# EAGLE board h_bridge_v1 (EAGLE 5.00)
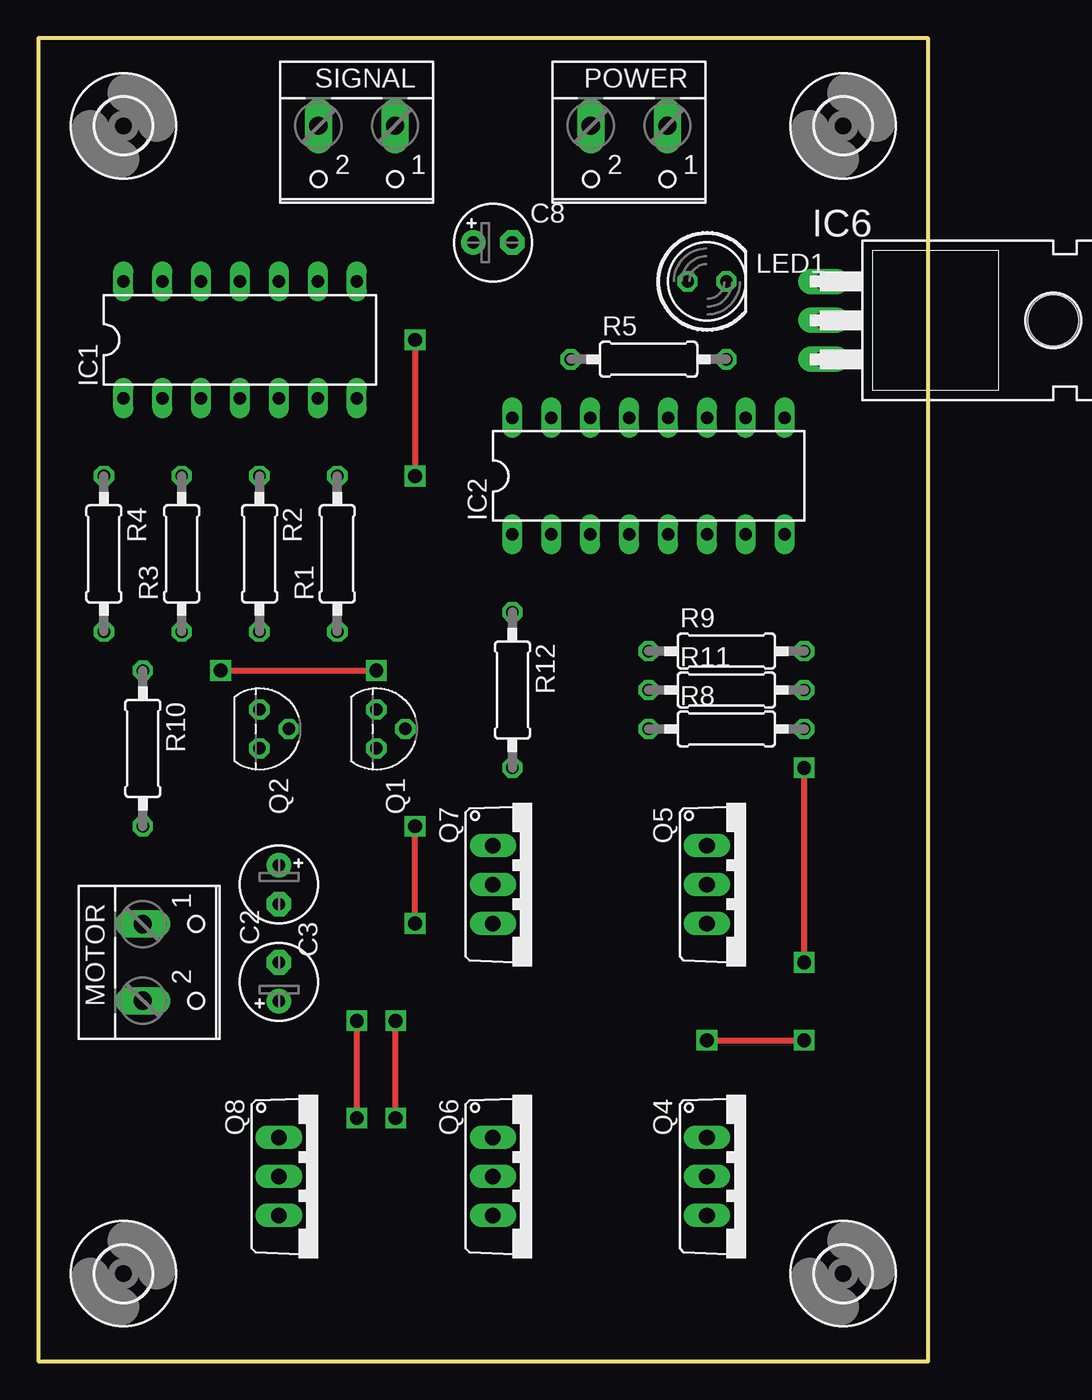
[diagram p0: board, top side]
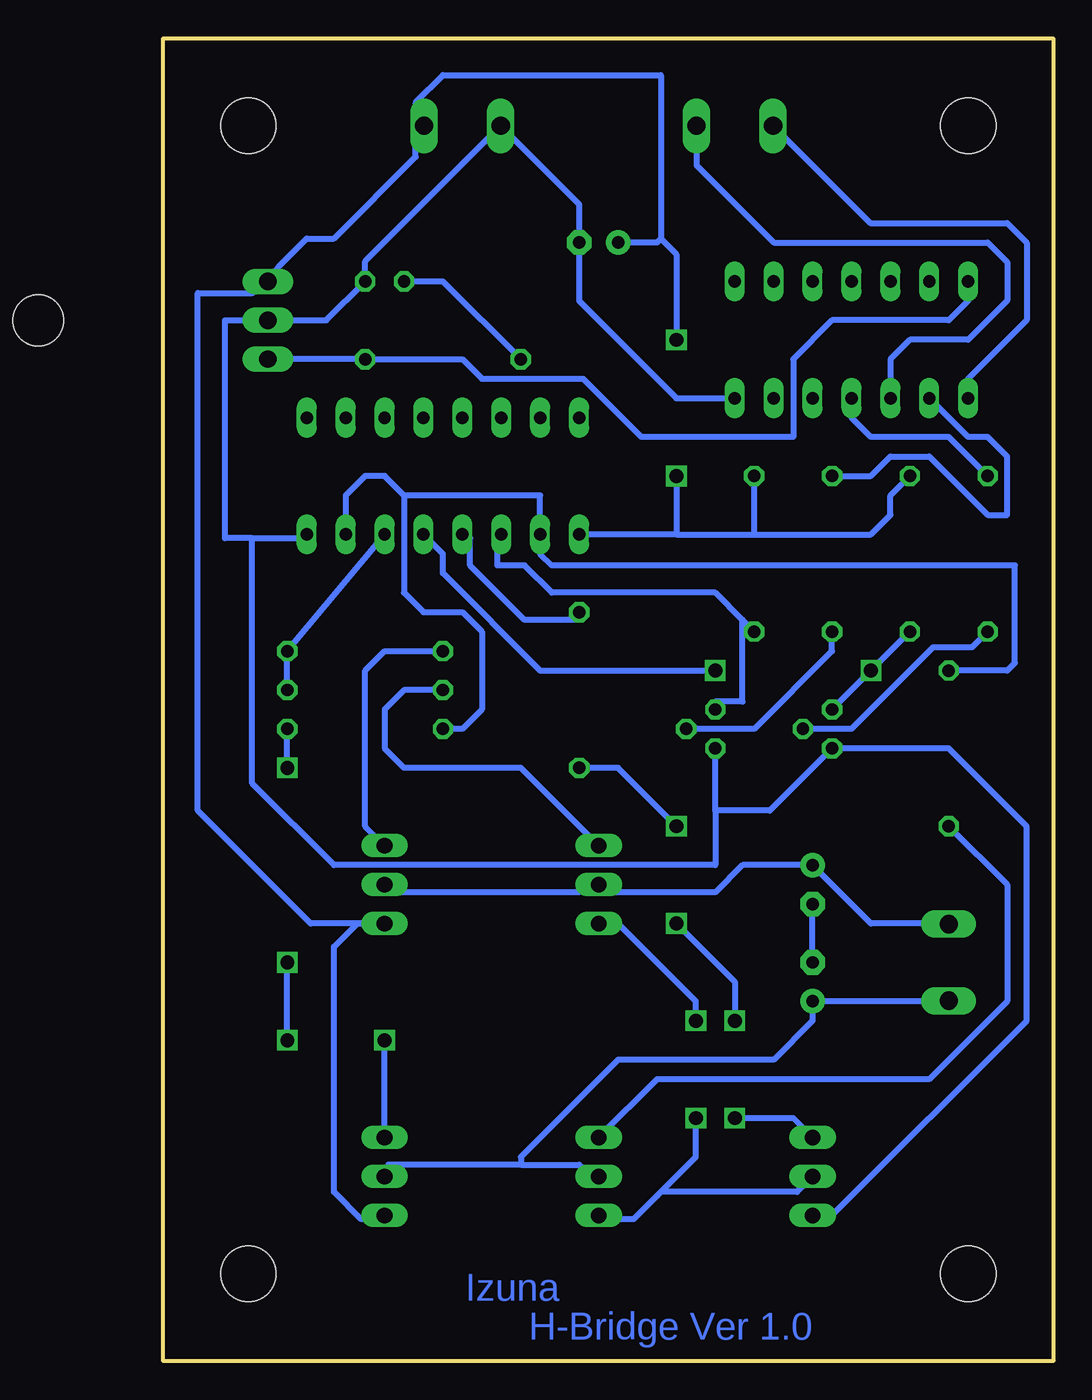
[diagram p1: board, bottom side, seen from below]

Size 58.09 x 86.35 mm. Coordinates in mm from the lower left corner, seen from the top.
Outline: 0,0 58.09,0 58.09,86.35 0,86.35 0,0
Copper layers (1*16): Top 0.035mm / dielectric 1.5mm / Bottom 0.035mm
Design rules "default": minimum track width 10mil, minimum drill 24mil, track to track 8mil, track to pad 8mil, pad to pad 8mil, via to via 8mil, smd to smd 8mil, copper to edge 40mil, drill to drill 8mil, minimum pad ring 10mil, minimum via ring 8mil, stop-mask expansion 4mil, vias tented up to drill 0mil, thermal gap 10mil

## Footprints (pad centres in the part's own frame; a part is rotated, then mirrored left to right if it is on the bottom)
E2,5-5 = drill 0.813 pad 1.6 round: + -1.27,0 | drill 0.813 pad 1.6 octagon: - 1.27,0
DIL14 = drill 0.813 long: 1 -7.62,-3.81; 2 -5.08,-3.81; 3 -2.54,-3.81; 4 0,-3.81; 5 2.54,-3.81; 6 5.08,-3.81; 7 7.62,-3.81; 8 7.62,3.81; 9 5.08,3.81; 10 2.54,3.81; 11 0,3.81; 12 -2.54,3.81; 13 -5.08,3.81; 14 -7.62,3.81
DIL16 = drill 0.813 long: 1 -8.89,-3.81; 2 -6.35,-3.81; 3 -3.81,-3.81; 4 -1.27,-3.81; 5 1.27,-3.81; 6 3.81,-3.81; 7 6.35,-3.81; 8 8.89,-3.81; 9 8.89,3.81; 10 6.35,3.81; 11 3.81,3.81; 12 1.27,3.81; 13 -1.27,3.81; 14 -3.81,3.81; 15 -6.35,3.81; 16 -8.89,3.81
TO220H = drill 1.118 long: 1 -2.54,-10.16; 2 0,-10.16; 3 2.54,-10.16 | hole 3.302: 0,4.826
LED5MM = drill 0.813 octagon: A -1.27,0; K 1.27,0
W237-102 = drill 1.194 long: 1 -2.5,-1.27; 2 2.5,-1.27
TO92 = drill 0.813 octagon: 1 1.27,0; 2 0,1.905; 3 -1.27,0
TO220AV = drill 1.016 long: B -2.54,-2.54; C 0,-2.54; E 2.54,-2.54
0207/10 = drill 0.813 octagon: 1 -5.08,0; 2 5.08,0
3,6 = hole 3.6: 0,0

## Placement (x,y rotation side)
C2  220 uF  [E2,5-5]  15.71,24.76 90 top
C3  220 uF  [E2,5-5]  15.71,31.11 270 top
C8  0.1 uF  [E2,5-5]  29.68,73.02 0 top
IC1  7404N  [DIL14]  13.17,66.67 0 top
IC2  4049N  [DIL16]  39.84,57.78 0 top
IC6  7805T  [TO220H]  61.43,67.94 270 top
LED1  [LED5MM]  43.65,70.48 0 top
MOTOR  [W237-102]  8.09,26.03 270 top
POWER  [W237-102]  38.57,79.37 180 top
Q1  BC337  [TO92]  22.06,41.27 270 top
Q2  BC337  [TO92]  14.44,41.27 270 top
Q4  TIP 115  [TO220AV]  46.19,12.06 270 top
Q5  TIP 115  [TO220AV]  46.19,31.11 270 top
Q6  TIP 112  [TO220AV]  32.22,12.06 270 top
Q7  TIP 112  [TO220AV]  32.22,31.11 270 top
Q8  TIP 112  [TO220AV]  18.25,12.06 270 top
R1  12 K  [0207/10]  19.52,52.7 90 top
R2  1 K  [0207/10]  14.44,52.7 270 top
R3  12 K  [0207/10]  9.36,52.7 90 top
R4  1 K  [0207/10]  4.28,52.7 270 top
R5  330  [0207/10]  39.84,65.4 0 top
R8  12 K  [0207/10]  44.92,41.27 0 top
R9  12 K  [0207/10]  44.92,46.35 0 top
R10  12 K  [0207/10]  6.82,40 270 top
R11  12 K  [0207/10]  44.92,43.81 0 top
R12  12 K  [0207/10]  30.95,43.81 270 top
SIGNAL  [W237-102]  20.79,79.37 180 top
U$1  [3,6]  5.55,5.71 0 top
U$2  [3,6]  52.54,5.71 0 top
U$3  [3,6]  52.54,80.64 0 top
U$4  [3,6]  5.55,80.64 0 top

## Library data of the parts
C2 C3 C8 R1-R5 R8-R12 = rcl
IC1 = 74ttl-din
IC2 = 40xx
IC6 = linear
LED1 = led
MOTOR POWER SIGNAL = con-wago-500
Q1 Q2 = transistor-npn
Q4-Q8 = transistor-power
U$1-U$4 = holes

## Nets
+5V: IC1.14 IC6.3 R5.2
+12V: C8.+ IC2.1 IC6.1 POWER.1 Q4.E Q5.E R1.2 R3.2
GND: C8.- IC1.7 IC2.8 IC6.2 LED1.K POWER.2 Q1.1 Q2.1 Q8.E
N$1: IC1.1 SIGNAL.2
N$2: IC2.5 Q2.3 R3.1
N$3: IC1.3 SIGNAL.1
N$4: LED1.A R5.1
N$5: Q1.2 R2.2
N$6: IC1.4 R4.1
N$7: IC2.6 R9.2 R11.2
N$9: IC1.2 R2.1
N$10: IC2.3 Q1.3 R1.1
N$11: Q2.2 R4.2
N$15: Q7.B R11.1
N$16: IC2.2 IC2.7 R8.1 R10.1
N$17: C3.+ MOTOR.1 Q5.C Q7.C
N$18: Q6.B R10.2
N$19: Q4.B R8.2
N$20: Q5.B R9.1
N$21: C2.+ MOTOR.2 Q4.C Q6.C
N$24: Q8.B R12.2
N$26: Q6.E Q7.E Q8.C
N$28: C2.- C3.-
N$29: IC2.4 R12.1

## Tracks (layer width: path | path; a pad name or v marks a point on that pad's centre or on a via)
+5V
  Bottom 0.406: IC1.14 5.55,69.21 6.82,67.94 14.44,67.94 16.98,65.4 16.98,60.32 26.89,60.32 30.7,64.13 37.3,64.13 38.57,65.4 R5.2 IC6.3
+12V  (via drill 0.9, 0.9 pad 0.61)
  Top 0.406: v24.6,66.67 v24.6,57.78
  Bottom 0.406: 30.95,53.72 IC2.1 24.6,53.97 | Q4.E 43.4,9.27 45.17,9.27 46.95,11.04 46.95,27.05 45.43,28.57 Q5.E 48.48,28.57 55.84,35.94 55.84,69.72 52.29,69.72 IC6.1 50.51,71.5 48.73,73.27 46.95,73.27 41.62,78.61 41.62,80.39 POWER.1 41.62,82.16 39.84,83.94 25.62,83.94 25.62,73.27 | 25.62,73.27 24.6,72.26 v24.6,66.67 | R3.2 10.63,56.51 10.63,55.24 11.9,53.97 19.52,53.97 | 24.6,53.97 19.52,53.97 | 19.52,53.97 R1.2 | v24.6,57.78 24.6,53.97 | 25.62,73.27 25.87,73.02 C8.+
GND
  Bottom 0.406: 22.06,35.94 22.06,32.38 46.95,32.38 52.29,37.71 52.29,53.72 | 52.29,53.72 48.73,53.72 IC2.8 | 22.06,35.94 Q1.1 | 52.29,53.72 54.06,53.72 54.06,67.94 IC6.2 47.46,67.94 LED1.K 44.92,71.79 POWER.2 30.95,75.52 C8.- 30.95,69.21 24.6,62.86 IC1.7 | 22.06,35.94 18.5,35.94 Q2.1 6.82,40 1.74,34.92 1.74,22.22 14.44,9.52 Q8.E
N$1
  Bottom 0.406: SIGNAL.2 11.94,74.29 3.01,74.29 1.74,73.02 1.74,67.94 5.55,64.13 IC1.1
N$2  (via drill 0.9)
  Top 0.406: v11.9,45.08 v22.06,45.08
  Bottom 0.406: R3.1 v11.9,45.08 Q2.3 | IC2.5 39.84,52.7 39.84,51.43 33.49,45.08 v22.06,45.08
N$3
  Bottom 0.406: SIGNAL.1 23.29,78.06 18.25,73.02 4.28,73.02 3.01,71.75 3.01,69.21 5.55,66.67 9.36,66.67 10.63,65.4 IC1.3
N$4
  Bottom 0.406: R5.1 39.84,70.48 LED1.A
N$5
  Bottom 0.406: Q1.2 19.52,41.27 14.44,46.35 R2.2
N$6
  Bottom 0.406: R4.1 6.82,60.32 11.9,60.32 13.17,61.59 IC1.4
N$7
  Bottom 0.406: R9.2 R11.2 R9.2 | R9.2 IC2.6
N$9
  Bottom 0.406: R2.1 11.9,57.78 10.63,59.05 8.09,59.05 4.28,55.24 3.01,55.24 3.01,59.05 4.28,60.32 5.55,60.32 IC1.2
N$10
  Bottom 0.406: 20.28,48.38 20.28,43.05 22.06,43.05 Q1.3 | 20.28,48.38 22.06,50.16 32.73,50.16 34.51,51.94 36.28,51.94 36.28,53.72 IC2.3 | 20.28,48.38 R1.1
N$11
  Bottom 0.406: 16.73,41.27 Q2.2 13.17,41.27 7.84,46.6 5.3,46.6 R4.2
N$15
  Bottom 0.406: Q7.B 34.76,38.73 42.38,38.73 43.65,40 43.65,42.54 42.38,43.81 R11.1
N$16
  Bottom 0.406: R10.1 3.01,45.08 2.5,45.59 2.5,51.94 32.73,51.94 33.49,52.7 | R8.1 38.57,41.27 37.3,42.54 37.3,47.62 38.57,48.89 41.11,48.89 42.38,50.16 42.38,56.51 | 42.38,56.51 43.65,57.78 44.92,57.78 46.19,56.51 IC2.7 | 33.49,52.7 IC2.2 | 33.49,52.7 33.49,56.51 42.38,56.51
N$17
  Bottom 0.406: Q5.C 43.4,30.6 30.95,30.6 Q7.C 29.17,30.6 22.06,30.6 20.28,32.38 C3.+ 11.9,28.57 6.82,28.57 MOTOR.1
N$18
  Bottom 0.406: R10.2 3.01,31.11 3.01,23.49 8.09,18.41 25.87,18.41 Q6.B
N$19  (via drill 0.9)
  Top 0.406: v43.65,20.95 v50,20.95 | v50,26.03 v50,38.73
  Bottom 0.406: Q4.B v43.65,20.95 | v50,20.95 v50,26.03 | v50,38.73 R8.2
N$20
  Bottom 0.406: R9.1 43.65,46.35 44.92,45.08 44.92,34.92 Q5.B
N$21
  Bottom 0.406: 34.76,12.82 30.95,12.82 Q6.C | 34.76,12.82 43.4,12.82 Q4.C | MOTOR.2 6.82,23.49 C2.+ 15.71,22.22 18.25,19.68 28.41,19.68 34.76,13.33 34.76,12.82
N$24  (via drill 0.9)
  Top 0.406: v24.6,28.57 v24.6,34.92 | v20.79,22.22 v20.79,15.87
  Bottom 0.406: R12.2 28.41,38.73 v24.6,34.92 | v24.6,28.57 20.79,24.76 v20.79,22.22 | v20.79,15.87 16.98,15.87 Q8.B
N$26  (via drill 0.9)
  Top 0.406: v23.33,15.87 v23.33,22.22
  Bottom 0.406: 25.87,10.79 25.62,11.04 16.73,11.04 Q8.C | 25.87,10.79 27.39,9.27 29.17,9.27 Q6.E | Q7.E 28.41,28.57 23.33,23.49 v23.33,22.22 | v23.33,15.87 23.33,13.33 25.87,10.79
N$28
  Bottom 0.406: C2.- C3.-
N$29
  Bottom 0.406: R12.1 30.95,48.38 34.51,48.38 38.06,51.94 38.06,53.72 IC2.4

## Text on the board
Bottom: Izuna | H-Bridge Ver 1.0